# Altium PCB AM438x_EPOS_EVM_PMconnect_v2.PcbDoc
Units mil, origin at the board's own origin, x right, y up, seen from the top; angles counter-clockwise.
Board outline 5020 x 1325 mil, 2 copper layers (Top Layer, Bottom Layer); 7 components, 12 nets, 24 pads, 1 vias.
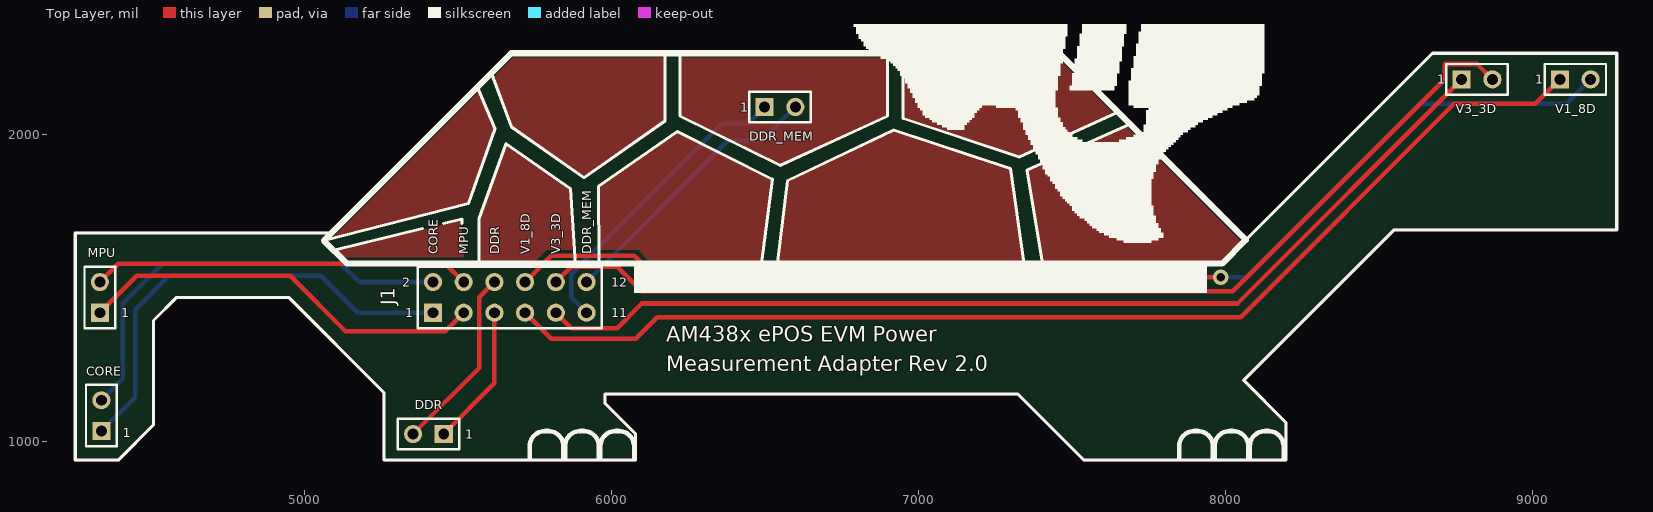
[diagram p0: Top Layer view]
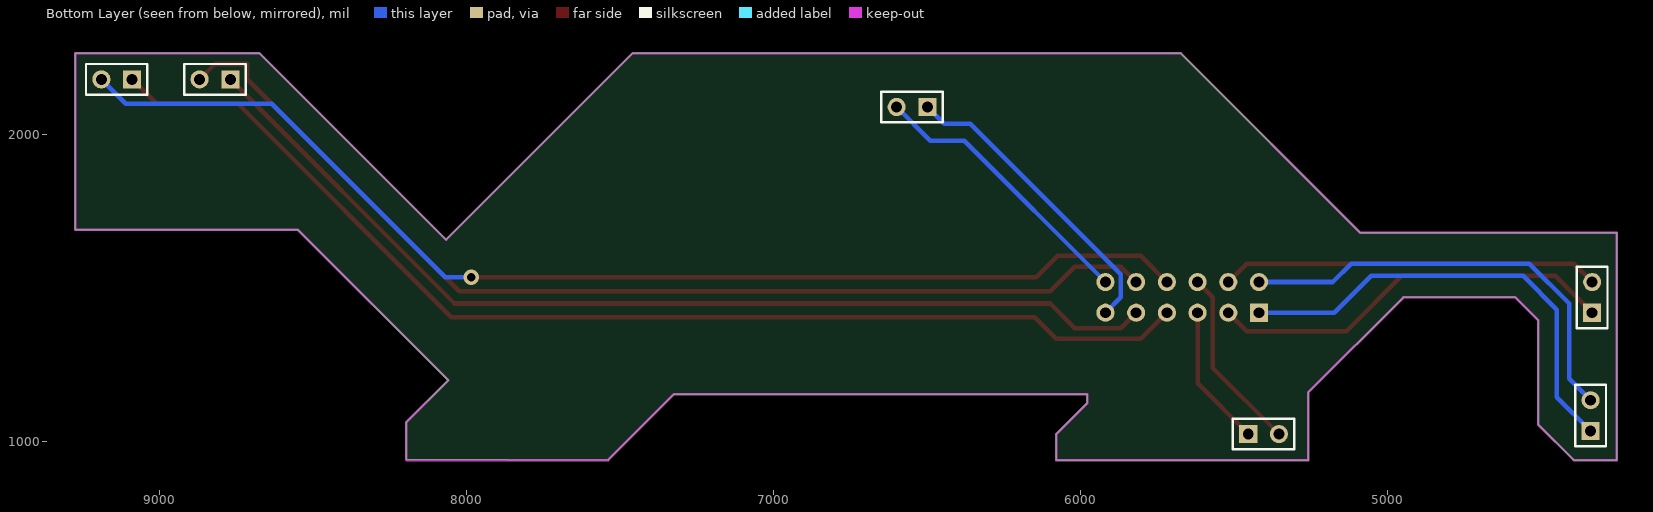
[diagram p1: Bottom Layer view, seen from below]

## Layer stack, top to bottom
Top Layer: signal copper 1.4
Dielectric: dielectric 12.6, FR-4, Dk 4.8
Bottom Layer: signal copper 1.4

## Board outline
4255,1680 5090,1680 5675,2265 7460,2265 8067.5,1657.5 8675,2265 9275,2265 9275,1690 8550,1690 8060,1200 8197.5,1062.5 8197.5,942.5 7540,940 7325,1155 5980,1155 5980,1125 6080,1025 6080,940 5260,940 5260,1160 4950,1470 4585,1470 4510,1395 4510,1055 4395,940 4255,940 4255,1680

## Design rules (kind name [scope] priority, off if disabled: settings)
Clearance [All] p1: gap=10
PolygonConnect [All] p1: connectstyle=Relief reliefconductorwidth=10 reliefentries=4 polygonreliefangle="90 Angle"
RoomDefinition AM438x_EPOS_EVM_PMconnect_v2 [InComponentClass('AM438x_EPOS_EVM_PMconnect_v2')] p1: confinementstyle=ConfineIn formatcopy=TRUE lockcomponents=FALSE outline 1075,160 9680,160 9680,6080 1075,6080
RoutingVias [All] p1: holewidth=28 width=50 viastyle="Through Hole" minholewidth=28 minwidth=50 maxholewidth=28 maxwidth=50
SilkscreenOverComponentPads [All] p1: minsilkscreentomaskgap=10
SolderMaskExpansion [All] p1: expansion=4
Width [All] p1: maxlimit=15 minlimit=15 preferedwidth=15
27 further rules are at their usual default settings.

## Components (designator, comment, footprint, x,y, rotation, side; value= is the part's Value field where it differs from the comment)
CORE "Header 2" HDR1X2 4340,1035 r90 top (schematic designator VDD_CORE)
DDR "Header 2" HDR1X2 5455,1025 r180 top (schematic designator VDDS_DDR)
DDR_MEM "Header 2" HDR1X2 6500,2090 r0 top (schematic designator VDDS_DDR_MEM)
J1 "Header 6X2" HDR2X6 5420,1420 r0 top
MPU "Header 2" HDR1X2 4335,1420 r90 top (schematic designator VDD_MPU)
V1_8D "Header 2" HDR1X2 9090,2180 r0 top (schematic designator V1_8D_AM438X)
V3_3D "Header 2" HDR1X2 8770,2180 r0 top (schematic designator V3_3D_AM438X)

## Footprints (in the part's own frame and the unit in brackets; to place one, negate y for a bottom-side part, rotate by r counter-clockwise, add the part's x,y. Pads: shape width x height; smd on the part's side, far side on the other; paste and mask are expansions set on the pad)
HDR1X2 [mm] "Connector; Header; 2 Position"
  rect 1.5x1.5 hole 0.9: 1(0,0)
  round 1.5 hole 0.9: 2(2.54,0)
  silkscreen extent -1.27,-1.27 3.81,1.27
HDR2X6 [mm] "Connector; Header; 6x2 Position"
  rect 1.5x1.5 hole 0.9: 1(0,0)
  round 1.5 hole 0.9: 2(0,2.54) 3(2.54,0) 4(2.54,2.54) 5(5.08,0) 6(5.08,2.54) 7(7.62,0) 8(7.62,2.54) 9(10.16,0) 10(10.16,2.54) 11(12.7,0) 12(12.7,2.54)
  silkscreen extent -1.27,-1.27 13.97,3.81

## Part data
CORE DDR DDR_MEM MPU V1_8D V3_3D: "Header, 2-Pin"
J1: "Header, 6-Pin, Dual row"

## Via types
v1: diameter 50, hole 28, Top Layer to Bottom Layer, 1 vias

## Nets (pads, with @x,y where several pads share a name; then routed paths per layer and width w, separated by ;. In a path a pad name is that pad's centre, name@x,y a point inside that pad or via, vN(x,y) a via of type N, cw(c..) or ccw(c..) an arc to the next point about the centre after c; other vN are vias at no path point)
CORE_N: CORE.2 J1.2 | length 1432.7
  Bottom Layer w15: CORE.2 4410,1205 4410,1450 4540,1580 5120,1580 5180,1520 J1.2
CORE_P: CORE.1 J1.1 | length 1505.8
  Bottom Layer w15: CORE.1 4450,1145 4450,1430 4560,1540 5055,1540 5175,1420 J1.1
DDR_MEM_N: DDR_MEM.2 J1.12 | length 916.1
  Bottom Layer w15: J1.12 6380,1980 6490,1980 DDR_MEM.2
DDR_MEM_P: DDR_MEM.1 J1.11 | length 1001.5
  Bottom Layer w15: J1.11 5870,1470 5870,1545 6360,2035 6445,2035 DDR_MEM.1
DDR_N: DDR.2 J1.6 | length 604.8
  Top Layer w15: DDR.2 5570,1240 5570,1470 J1.6
DDR_P: DDR.1 J1.5 | length 463.3
  Top Layer w15: DDR.1 5620,1190 J1.5
MPU_N: J1.4 MPU.2 | length 1234.7
  Top Layer w15: MPU.2 4395,1580 5460,1580 J1.4
MPU_P: J1.3 MPU.1 | length 1334.1
  Top Layer w15: MPU.1 4455,1540 4955,1540 5135,1360 5460,1360 J1.3
V1_8D_N: J1.8 V1_8D.2 | length 3801.4
  Top Layer w15: J1.8 5805,1605 6075,1605 6145,1535 v1(7985,1535)
  Bottom Layer w15: v1(7985,1535) 8070,1535 8635,2100 9110,2100 V1_8D.2
V1_8D_P: J1.7 V1_8D.1 | length 3755.2
  Top Layer w15: J1.7 5805,1335 6080,1335 6150,1405 8050,1405 8745,2100 9010,2100 V1_8D.1
V3_3D_N: J1.10 V3_3D.2 | length 3460.4
  Top Layer w15: J1.10 5870,1570 6020,1570 6100,1490 8025,1490 8715,2180 8715,2230 8820,2230 V3_3D.2
V3_3D_P: J1.9 V3_3D.1 | length 3306.2
  Top Layer w15: J1.9 5870,1370 6020,1370 6100,1450 8040,1450 V3_3D.1

## Polygon pours and split planes (outlines as drawn)
no net on Top Layer "Top Overlay-No Net" (solid, pour order 42): 5960,1830 6215,2010 6525,1855 6490,1585 6125,1585 6090,1625 5960,1625 5960,1830
no net on Top Layer "Top Overlay-No Net" (solid, pour order 40): 6950,2055 6950,2260 7455,2260 7645,2070 7330,1925 6950,2055
no net on Top Layer "Top Overlay-No Net" (solid, pour order 38): 6225,2060 6225,2260 6900,2260 6900,2060 6550,1900 6550,2040 6650,2040 6650,2140 6450,2140 6450,2040 6550,2040 6550,1900 6225,2060
no net on Top Layer "Top Overlay-No Net" (solid, pour order 36): 5675,2025 5910,1860 6175,2045 6175,2260 5680,2260 5610,2190 5675,2025
no net on Top Layer "Top Overlay-No Net" (solid, pour order 24): 5570,1580 5570,1725 5660,1970 5865,1825 5880,1625 5790,1625 5745,1580 5575,1580 5570,1580
no net on Top Layer "Top Overlay-No Net" (solid, pour order 22): 5100,1620 5510,1720 5520,1600 5125,1600 5105,1620
no net on Top Layer "Top Overlay-No Net" (solid, pour order 18): 5565,2150 5620,2020 5535,1775 5065,1655 5560,2150
no net on Top Layer "Top Overlay-No Net" (solid, pour order 10): 6540,1585 6575,1850 6920,2015 7300,1890 7345,1580 6540,1580
no net on Top Layer "Top Overlay-No Net" (solid, pour order 8): 7690,2035 7355,1885 7405,1580 7985,1580 8067.5,1657.5 7690,2035

## Keep-outs
Keep-Out Layer:
  lines w8: 4255,940 4395,940 4510,1055 4510,1395 4585,1470 4950,1470 5260,1160 5260,940 6080,940 6080,1025 5980,1125 5980,1155 5990,1155 7325,1155 7540,940 8195,940 8197.5,942.5 8197.5,1062.5 8060,1200 8550,1690 9275,1690 9275,2265 8675,2265 8067.5,1657.5 7460,2265 5675,2265 5090,1680 4535,1680 4255,1680 4255,940

## Silkscreen, mask and mechanical layers (free items; w line width, h text height)
Top Overlay:
  drawing of 94 lines, arcs and shapes, not listed
  text "1" at 8690,2165 h30
  text "1" at 9010,2165 h30
  text "1" at 6420,2075 h30
  text "CORE" at 5435,1610 h30 r90
  text "MPU" at 5535,1610 h30 r90
  text "DDR" at 5635,1610 h30 r90
  text "V1_8D" at 5735,1610 h30 r90
  text "V3_3D" at 5835,1610 h30 r90
  text "DDR_MEM" at 5935,1610 h30 r90
  text "1" at 4405,1405 h30
  text "AM438x ePOS EVM Power" at 6180,1325 h50
  text "Measurement Adapter Rev 2.0" at 6180,1230 h50
  text "1" at 4410,1015 h30
  text "1" at 5525,1010 h30

## Text inside footprints (layer, text, board x,y; h text height)
J1: Top Overlay "12" at 6000,1505 h30; Top Overlay "11" at 6000,1405 h30; Top Overlay "1" at 5330,1405 h30; Top Overlay "2" at 5320,1505 h30